# EAGLE board MLX_2X5 (EAGLE 9.6.2)
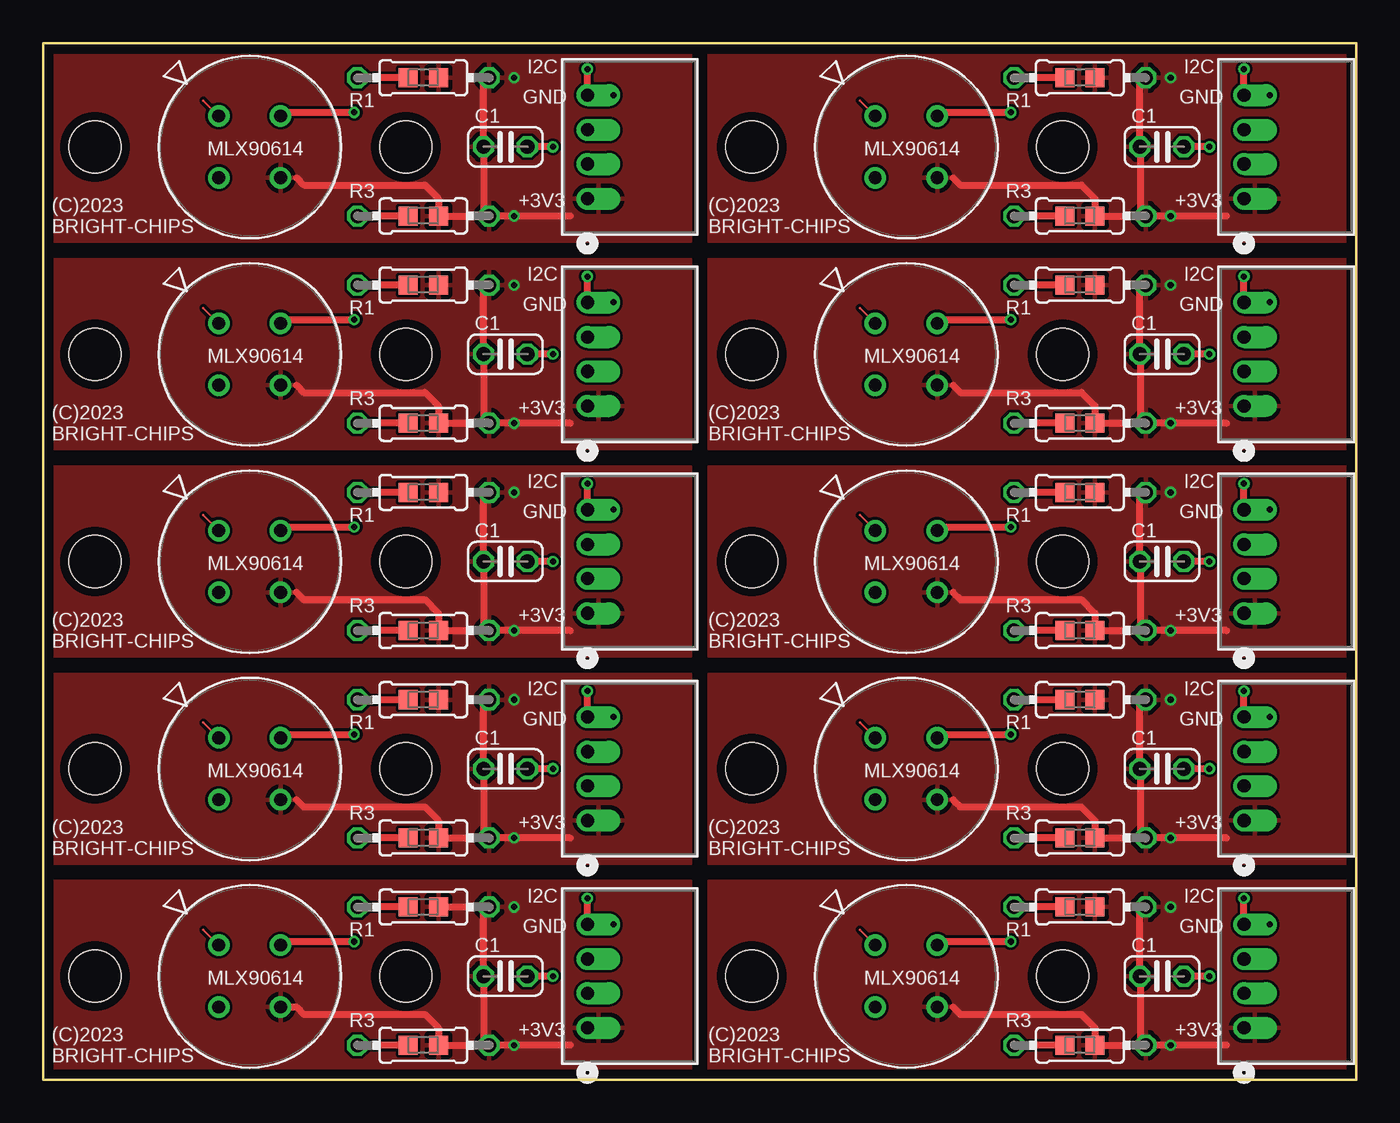
[diagram p0: board, top side]
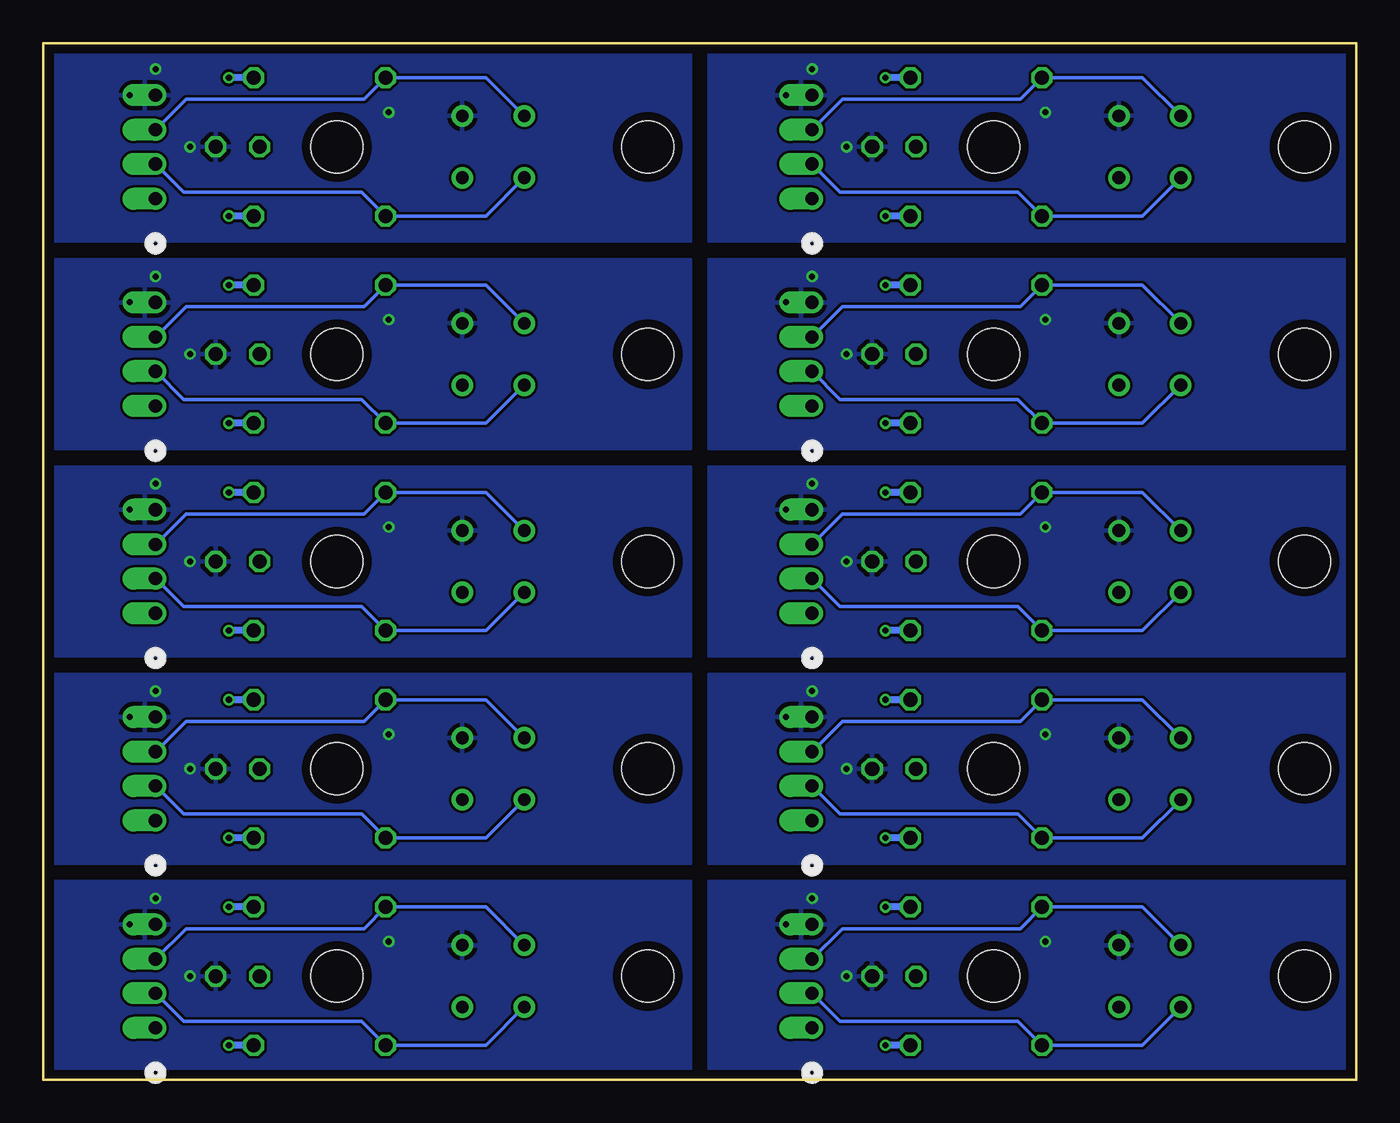
[diagram p1: board, bottom side, seen from below]

Size 76 x 60 mm. Coordinates in mm from the lower left corner, seen from the top.
Outline: 0,60 76,60 76,0 0,0 0,60
Copper layers (1*16): Top 0.035mm / dielectric 1.6mm / Bottom 0.035mm
Design rules "Elecrow_2-layer_PCB_eagle_rule": minimum track width 6mil, minimum drill 12mil, track to track 6mil, track to pad 6mil, pad to pad 6mil, via to via 8mil, smd to smd 0mil, copper to edge 20mil, drill to drill 10mil, minimum pad ring 6mil, minimum via ring 6mil, stop-mask expansion 0mil, vias tented up to drill 100mil, thermal gap 10mil
Holes 3 mm at 3,6 21,6 3,18 21,18 3,30 21,30 3,42 21,42 3,54 21,54 41,6 59,6 41,18 59,18 41,30 59,30 41,42 59,42 41,54 59,54
vRestrict: 5 lines

## Footprints (pad centres in the part's own frame; a part is rotated, then mirrored left to right if it is on the bottom)
C025-024X044 = drill 0.813 octagon: 1 -1.27,0; 2 1.27,0
CONN_S4B-PH-K-S_JST = drill 0.762 pad 1.27 offset: 1 0,0; 2 2.007,0; 3 3.988,0; 4 5.994,0
0204/7 = drill 0.813 octagon: 1 -3.81,0; 2 3.81,0
RESC1608X55N = smd 1.1 x 1.1: 1 -0.88,0; 2 0.88,0
MLX90614XCC_MEL = drill 0.737 pad 1.245: 1 0,0; 2 0,-3.581; 3 3.581,-3.581; 4 3.581,0

## Placement (x,y rotation side)
C1  [C025-024X044]  26.75,6 0 top
C2  [C025-024X044]  26.75,18 0 top
C3  [C025-024X044]  26.75,30 0 top
C4  [C025-024X044]  26.75,42 0 top
C5  [C025-024X044]  26.75,54 0 top
C6  [C025-024X044]  64.75,6 0 top
C7  [C025-024X044]  64.75,18 0 top
C8  [C025-024X044]  64.75,30 0 top
C9  [C025-024X044]  64.75,42 0 top
C10  [C025-024X044]  64.75,54 0 top
J1  S4B-PH-K-S(LF)(SN)  [CONN_S4B-PH-K-S_JST]  31.5,3 90 top
J2  S4B-PH-K-S(LF)(SN)  [CONN_S4B-PH-K-S_JST]  31.5,15 90 top
J3  S4B-PH-K-S(LF)(SN)  [CONN_S4B-PH-K-S_JST]  31.5,27 90 top
J4  S4B-PH-K-S(LF)(SN)  [CONN_S4B-PH-K-S_JST]  31.5,39 90 top
J5  S4B-PH-K-S(LF)(SN)  [CONN_S4B-PH-K-S_JST]  31.5,51 90 top
J6  S4B-PH-K-S(LF)(SN)  [CONN_S4B-PH-K-S_JST]  69.5,3 90 top
J7  S4B-PH-K-S(LF)(SN)  [CONN_S4B-PH-K-S_JST]  69.5,15 90 top
J8  S4B-PH-K-S(LF)(SN)  [CONN_S4B-PH-K-S_JST]  69.5,27 90 top
J9  S4B-PH-K-S(LF)(SN)  [CONN_S4B-PH-K-S_JST]  69.5,39 90 top
J10  S4B-PH-K-S(LF)(SN)  [CONN_S4B-PH-K-S_JST]  69.5,51 90 top
R1  [0204/7]  22,10 0 top
R2  RK73B1JTTD103J  [RESC1608X55N]  22,10 0 top
R3  [0204/7]  22,2 0 top
R4  RK73B1JTTD103J  [RESC1608X55N]  22,2 0 top
R5  [0204/7]  22,22 0 top
R6  RK73B1JTTD103J  [RESC1608X55N]  22,22 0 top
R7  [0204/7]  22,14 0 top
R8  RK73B1JTTD103J  [RESC1608X55N]  22,14 0 top
R9  [0204/7]  22,34 0 top
R10  RK73B1JTTD103J  [RESC1608X55N]  22,34 0 top
R11  [0204/7]  22,26 0 top
R12  RK73B1JTTD103J  [RESC1608X55N]  22,26 0 top
R13  [0204/7]  22,46 0 top
R14  RK73B1JTTD103J  [RESC1608X55N]  22,46 0 top
R15  [0204/7]  22,38 0 top
R16  RK73B1JTTD103J  [RESC1608X55N]  22,38 0 top
R17  [0204/7]  22,58 0 top
R18  RK73B1JTTD103J  [RESC1608X55N]  22,58 0 top
R19  [0204/7]  22,50 0 top
R20  RK73B1JTTD103J  [RESC1608X55N]  22,50 0 top
R21  [0204/7]  60,10 0 top
R22  RK73B1JTTD103J  [RESC1608X55N]  60,10 0 top
R23  [0204/7]  60,2 0 top
R24  RK73B1JTTD103J  [RESC1608X55N]  60,2 0 top
R25  [0204/7]  60,22 0 top
R26  RK73B1JTTD103J  [RESC1608X55N]  60,22 0 top
R27  [0204/7]  60,14 0 top
R28  RK73B1JTTD103J  [RESC1608X55N]  60,14 0 top
R29  [0204/7]  60,34 0 top
R30  RK73B1JTTD103J  [RESC1608X55N]  60,34 0 top
R31  [0204/7]  60,26 0 top
R32  RK73B1JTTD103J  [RESC1608X55N]  60,26 0 top
R33  [0204/7]  60,46 0 top
R34  RK73B1JTTD103J  [RESC1608X55N]  60,46 0 top
R35  [0204/7]  60,38 0 top
R36  RK73B1JTTD103J  [RESC1608X55N]  60,38 0 top
R37  [0204/7]  60,58 0 top
R38  RK73B1JTTD103J  [RESC1608X55N]  60,58 0 top
R39  [0204/7]  60,50 0 top
R40  RK73B1JTTD103J  [RESC1608X55N]  60,50 0 top
U1  MLX90614ESF-BCC-000-TU  [MLX90614XCC_MEL]  10.16,7.79 0 top
U2  MLX90614ESF-BCC-000-TU  [MLX90614XCC_MEL]  10.16,19.79 0 top
U3  MLX90614ESF-BCC-000-TU  [MLX90614XCC_MEL]  10.16,31.79 0 top
U4  MLX90614ESF-BCC-000-TU  [MLX90614XCC_MEL]  10.16,43.79 0 top
U5  MLX90614ESF-BCC-000-TU  [MLX90614XCC_MEL]  10.16,55.79 0 top
U6  MLX90614ESF-BCC-000-TU  [MLX90614XCC_MEL]  48.16,7.79 0 top
U7  MLX90614ESF-BCC-000-TU  [MLX90614XCC_MEL]  48.16,19.79 0 top
U8  MLX90614ESF-BCC-000-TU  [MLX90614XCC_MEL]  48.16,31.79 0 top
U9  MLX90614ESF-BCC-000-TU  [MLX90614XCC_MEL]  48.16,43.79 0 top
U10  MLX90614ESF-BCC-000-TU  [MLX90614XCC_MEL]  48.16,55.79 0 top

## Library data of the parts
C1-C10 = AU222_F; SPICEPREFIX: C
J1-J10 = AU222_F; COPYRIGHT: Copyright (C) 2023 Ultra Librarian. All rights reserved.; DIGI-KEY_PART_NUMBER_1: 455-1721-ND; DIGI-KEY_PART_NUMBER_2: 455-1721-NDL; MANUFACTURER_PART_NUMBER: S4B-PH-K-S(LF)(SN); MFR_NAME: JST
R1 R3 R5 R7 R9 R11 R13 R15 R17 R19 R21 R23 R25 R27 R29 R31 R33 R35 R37 R39 = AU222_F; SPICEPREFIX: R
R2 R4 R6 R8 R10 R12 R14 R16 R18 R20 R22 R24 R26 R28 R30 R32 R34 R36 R38 R40 = AU222_F; DESCRIPTION: 10 kOhms ±5% 0.1W, 1/10W Chip Resistor 0603 (1608 Metric) Automotive AEC-Q200, Moisture Resistant Thick Film; DIGI-KEY_PART_NUMBER: 2019-RK73B1JTTD103JCT-ND; MF: KOA Speer; MP: RK73B1JTTD103J; PACKAGE: 0603 KOA Speer; PURCHASE-URL: https://pricing.snapeda.com/search/part/RK73B1JTTD103J/?ref=eda
U1-U10 = AU222_F; COPYRIGHT: Copyright (C) 2023 Ultra Librarian. All rights reserved.; DIGI-KEY_PART_NUMBER_1: MLX90614ESF-BCC-000-TU-ND; MANUFACTURER_PART_NUMBER: MLX90614ESF-BCC-000-TU; MFR_NAME: Melexis

## Nets
+3V1: C2.1 J2.1 R5.2 R6.2 R7.2 R8.2 U2.3
+3V2: C3.1 J3.1 R9.2 R10.2 R11.2 R12.2 U3.3
+3V3: C1.1 J1.1 R1.2 R2.2 R3.2 R4.2 U1.3
+3V4: C4.1 J4.1 R13.2 R14.2 R15.2 R16.2 U4.3
+3V5: C5.1 J5.1 R17.2 R18.2 R19.2 R20.2 U5.3
+3V6: C6.1 J6.1 R21.2 R22.2 R23.2 R24.2 U6.3
+3V7: C7.1 J7.1 R25.2 R26.2 R27.2 R28.2 U7.3
+3V8: C8.1 J8.1 R29.2 R30.2 R31.2 R32.2 U8.3
+3V9: C9.1 J9.1 R33.2 R34.2 R35.2 R36.2 U9.3
+3V10: C10.1 J10.1 R37.2 R38.2 R39.2 R40.2 U10.3
GND: C1.2 J1.4 U1.4
GND1: C2.2 J2.4 U2.4
GND2: C3.2 J3.4 U3.4
GND3: C4.2 J4.4 U4.4
GND4: C5.2 J5.4 U5.4
GND5: C6.2 J6.4 U6.4
GND6: C7.2 J7.4 U7.4
GND7: C8.2 J8.4 U8.4
GND8: C9.2 J9.4 U9.4
GND9: C10.2 J10.4 U10.4
SCL: J1.3 R1.1 R2.1 U1.1
SCL1: J2.3 R5.1 R6.1 U2.1
SCL2: J3.3 R9.1 R10.1 U3.1
SCL3: J4.3 R13.1 R14.1 U4.1
SCL4: J5.3 R17.1 R18.1 U5.1
SCL5: J6.3 R21.1 R22.1 U6.1
SCL6: J7.3 R25.1 R26.1 U7.1
SCL7: J8.3 R29.1 R30.1 U8.1
SCL8: J9.3 R33.1 R34.1 U9.1
SCL9: J10.3 R37.1 R38.1 U10.1
SDA: J1.2 R3.1 R4.1 U1.2
SDA1: J2.2 R7.1 R8.1 U2.2
SDA2: J3.2 R11.1 R12.1 U3.2
SDA3: J4.2 R15.1 R16.1 U4.2
SDA4: J5.2 R19.1 R20.1 U5.2
SDA5: J6.2 R23.1 R24.1 U6.2
SDA6: J7.2 R27.1 R28.1 U7.2
SDA7: J8.2 R31.1 R32.1 U8.2
SDA8: J9.2 R35.1 R36.1 U9.2
SDA9: J10.2 R39.1 R40.1 U10.2

## Tracks (layer width: path | path; a pad name or v marks a point on that pad's centre or on a via)
+3V1  (via drill 0.35)
  Top 0.406: 25.5,14 R8.2 22.88,15 22.09,15.79 15.08,15.79 14.66,16.21 | 25.5,14 R7.2 30.5,14 | 25.5,14 25.5,17.98 C2.1 25.48,21.98 25.5,22
  Bottom 0.406: R5.2 v27.25,22 | R7.2 v27.25,14
  pour Top: 0.5,23.5 0.5,12.5 37.5,12.5 37.5,23.5
+3V2  (via drill 0.35)
  Top 0.406: 25.5,26 R12.2 22.88,27 22.09,27.79 15.08,27.79 14.66,28.21 | 25.5,26 R11.2 30.5,26 | 25.5,26 25.5,29.98 C3.1 25.48,33.98 25.5,34
  Bottom 0.406: R9.2 v27.25,34 | R11.2 v27.25,26
  pour Top: 0.5,35.5 0.5,24.5 37.5,24.5 37.5,35.5
+3V3  (via drill 0.35)
  Top 0.406: R2.2 25.5,10 | 25.5,10 R1.2 | 25.5,2 R4.2 22.88,3 22.09,3.79 15.08,3.79 14.66,4.21 U1.3 | 25.5,2 R3.2 30.5,2 | 25.5,2 25.5,5.98 C1.1 25.48,9.98 25.5,10
  Bottom 0.406: R1.2 v27.25,10 | R3.2 v27.25,2
  pour Top: 0.5,11.5 0.5,0.5 37.5,0.5 37.5,11.5
+3V4  (via drill 0.35)
  Top 0.406: 25.5,38 R16.2 22.88,39 22.09,39.79 15.08,39.79 14.66,40.21 | 25.5,38 R15.2 30.5,38 | 25.5,38 25.5,41.98 C4.1 25.48,45.98 25.5,46
  Bottom 0.406: R13.2 v27.25,46 | R15.2 v27.25,38
  pour Top: 0.5,47.5 0.5,36.5 37.5,36.5 37.5,47.5
+3V5  (via drill 0.35)
  Top 0.406: 25.5,50 R20.2 22.88,51 22.09,51.79 15.08,51.79 14.66,52.21 | 25.5,50 R19.2 30.5,50 | 25.5,50 25.5,53.98 C5.1 25.48,57.98 25.5,58
  Bottom 0.406: R17.2 v27.25,58 | R19.2 v27.25,50
  pour Top: 0.5,59.5 0.5,48.5 37.5,48.5 37.5,59.5
+3V6  (via drill 0.35)
  Top 0.406: 63.5,2 R24.2 60.88,3 60.09,3.79 53.08,3.79 52.66,4.21 | 63.5,2 R23.2 68.5,2 | 63.5,2 63.5,5.98 C6.1 63.48,9.98 63.5,10
  Bottom 0.406: R21.2 v65.25,10 | R23.2 v65.25,2
  pour Top: 38.5,11.5 38.5,0.5 75.5,0.5 75.5,11.5
+3V7  (via drill 0.35)
  Top 0.406: 63.5,14 R28.2 60.88,15 60.09,15.79 53.08,15.79 52.66,16.21 | 63.5,14 R27.2 68.5,14 | 63.5,14 63.5,17.98 C7.1 63.48,21.98 63.5,22
  Bottom 0.406: R25.2 v65.25,22 | R27.2 v65.25,14
  pour Top: 38.5,23.5 38.5,12.5 75.5,12.5 75.5,23.5
+3V8  (via drill 0.35)
  Top 0.406: 63.5,26 R32.2 60.88,27 60.09,27.79 53.08,27.79 52.66,28.21 | 63.5,26 R31.2 68.5,26 | 63.5,26 63.5,29.98 C8.1 63.48,33.98 63.5,34
  Bottom 0.406: R29.2 v65.25,34 | R31.2 v65.25,26
  pour Top: 38.5,35.5 38.5,24.5 75.5,24.5 75.5,35.5
+3V9  (via drill 0.35)
  Top 0.406: 63.5,38 R36.2 60.88,39 60.09,39.79 53.08,39.79 52.66,40.21 | 63.5,38 R35.2 68.5,38 | 63.5,38 63.5,41.98 C9.1 63.48,45.98 63.5,46
  Bottom 0.406: R33.2 v65.25,46 | R35.2 v65.25,38
  pour Top: 38.5,47.5 38.5,36.5 75.5,36.5 75.5,47.5
+3V10  (via drill 0.35)
  Top 0.406: 63.5,50 R40.2 60.88,51 60.09,51.79 53.08,51.79 52.66,52.21 | 63.5,50 R39.2 68.5,50 | 63.5,50 63.5,53.98 C10.1 63.48,57.98 63.5,58
  Bottom 0.406: R37.2 v65.25,58 | R39.2 v65.25,50
  pour Top: 38.5,59.5 38.5,48.5 75.5,48.5 75.5,59.5
GND  (via drill 0.35)
  Top 0.406: v29.5,6 C1.2 | v31.5,10.5 J1.4 v32.99,8.99 v33,9 | 13.95,8 v18,8
  pour Bottom: 0.5,11.5 0.5,0.5 37.5,0.5 37.5,11.5
GND1  (via drill 0.35)
  Top 0.406: v29.5,18 C2.2 | v31.5,22.5 J2.4 v32.99,20.99 v33,21 | 13.95,20 v18,20
  pour Bottom: 0.5,23.5 0.5,12.5 37.5,12.5 37.5,23.5
GND2  (via drill 0.35)
  Top 0.406: v29.5,30 C3.2 | v31.5,34.5 J3.4 v32.99,32.99 v33,33 | 13.95,32 v18,32
  pour Bottom: 0.5,35.5 0.5,24.5 37.5,24.5 37.5,35.5
GND3  (via drill 0.35)
  Top 0.406: v29.5,42 C4.2 | v31.5,46.5 J4.4 v32.99,44.99 v33,45 | 13.95,44 v18,44
  pour Bottom: 0.5,47.5 0.5,36.5 37.5,36.5 37.5,47.5
GND4  (via drill 0.35)
  Top 0.406: v29.5,54 C5.2 | v31.5,58.5 J5.4 v32.99,56.99 v33,57 | 13.95,56 v18,56
  pour Bottom: 0.5,59.5 0.5,48.5 37.5,48.5 37.5,59.5
GND5  (via drill 0.35)
  Top 0.406: v67.5,6 C6.2 | v69.5,10.5 J6.4 v70.99,8.99 v71,9 | 51.95,8 v56,8
  pour Bottom: 38.5,11.5 38.5,0.5 75.5,0.5 75.5,11.5
GND6  (via drill 0.35)
  Top 0.406: v67.5,18 C7.2 | v69.5,22.5 J7.4 v70.99,20.99 v71,21 | 51.95,20 v56,20
  pour Bottom: 38.5,23.5 38.5,12.5 75.5,12.5 75.5,23.5
GND7  (via drill 0.35)
  Top 0.406: v67.5,30 C8.2 | v69.5,34.5 J8.4 v70.99,32.99 v71,33 | 51.95,32 v56,32
  pour Bottom: 38.5,35.5 38.5,24.5 75.5,24.5 75.5,35.5
GND8  (via drill 0.35)
  Top 0.406: v67.5,42 C9.2 | v69.5,46.5 J9.4 v70.99,44.99 v71,45 | 51.95,44 v56,44
  pour Bottom: 38.5,47.5 38.5,36.5 75.5,36.5 75.5,47.5
GND9  (via drill 0.35)
  Top 0.406: v67.5,54 C10.2 | v69.5,58.5 J10.4 v70.99,56.99 v71,57 | 51.95,56 v56,56
  pour Bottom: 38.5,59.5 38.5,48.5 75.5,48.5 75.5,59.5
SCL
  Top 0.406: R2.1 R1.1
  Bottom 0.2: J1.3 29.74,8.75 19.44,8.75 R1.1 12.37,10 U1.1
SCL1
  Top 0.406: R6.1 R5.1
  Bottom 0.2: J2.3 29.74,20.75 19.44,20.75 R5.1 12.37,22 U2.1
SCL2
  Top 0.406: R10.1 R9.1
  Bottom 0.2: J3.3 29.74,32.75 19.44,32.75 R9.1 12.37,34 U3.1
SCL3
  Top 0.406: R14.1 R13.1
  Bottom 0.2: J4.3 29.74,44.75 19.44,44.75 R13.1 12.37,46 U4.1
SCL4
  Top 0.406: R18.1 R17.1
  Bottom 0.2: J5.3 29.74,56.75 19.44,56.75 R17.1 12.37,58 U5.1
SCL5
  Top 0.406: R22.1 R21.1
  Bottom 0.2: J6.3 67.74,8.75 57.44,8.75 R21.1 50.37,10 U6.1
SCL6
  Top 0.406: R26.1 R25.1
  Bottom 0.2: J7.3 67.74,20.75 57.44,20.75 R25.1 50.37,22 U7.1
SCL7
  Top 0.406: R30.1 R29.1
  Bottom 0.2: J8.3 67.74,32.75 57.44,32.75 R29.1 50.37,34 U8.1
SCL8
  Top 0.406: R34.1 R33.1
  Bottom 0.2: J9.3 67.74,44.75 57.44,44.75 R33.1 50.37,46 U9.1
SCL9
  Top 0.406: R38.1 R37.1
  Bottom 0.2: J10.3 67.74,56.75 57.44,56.75 R37.1 50.37,58 U10.1
SDA
  Top 0.406: R4.1 R3.1
  Bottom 0.2: J1.2 29.88,3.38 19.57,3.38 R3.1 12.37,2 U1.2
SDA1
  Top 0.406: R8.1 R7.1
  Bottom 0.2: J2.2 29.88,15.38 19.57,15.38 R7.1 12.37,14 U2.2
SDA2
  Top 0.406: R12.1 R11.1
  Bottom 0.2: J3.2 29.88,27.38 19.57,27.38 R11.1 12.37,26 U3.2
SDA3
  Top 0.406: R16.1 R15.1
  Bottom 0.2: J4.2 29.88,39.38 19.57,39.38 R15.1 12.37,38 U4.2
SDA4
  Top 0.406: R20.1 R19.1
  Bottom 0.2: J5.2 29.88,51.38 19.57,51.38 R19.1 12.37,50 U5.2
SDA5
  Top 0.406: R24.1 R23.1
  Bottom 0.2: J6.2 67.88,3.38 57.57,3.38 R23.1 50.37,2 U6.2
SDA6
  Top 0.406: R28.1 R27.1
  Bottom 0.2: J7.2 67.88,15.38 57.57,15.38 R27.1 50.37,14 U7.2
SDA7
  Top 0.406: R32.1 R31.1
  Bottom 0.2: J8.2 67.88,27.38 57.57,27.38 R31.1 50.37,26 U8.2
SDA8
  Top 0.406: R36.1 R35.1
  Bottom 0.2: J9.2 67.88,39.38 57.57,39.38 R35.1 50.37,38 U9.2
SDA9
  Top 0.406: R40.1 R39.1
  Bottom 0.2: J10.2 67.88,51.38 57.57,51.38 R39.1 50.37,50 U10.2

## Text on the board
tPlace: I2C | I2C | GND | GND | MLX90614 | MLX90614 | +3V3 | +3V3 | (C)2023 / BRIGHT-CHIPS | (C)2023 / BRIGHT-CHIPS | I2C | I2C | GND | GND | MLX90614 | MLX90614 | +3V3 | +3V3 | (C)2023 / BRIGHT-CHIPS | (C)2023 / BRIGHT-CHIPS | I2C | I2C | GND | GND | MLX90614 | MLX90614 | +3V3 | +3V3 | (C)2023 / BRIGHT-CHIPS | (C)2023 / BRIGHT-CHIPS | I2C | I2C | GND | GND | MLX90614 | MLX90614 | +3V3 | +3V3 | (C)2023 / BRIGHT-CHIPS | (C)2023 / BRIGHT-CHIPS | I2C | I2C | GND | GND | MLX90614 | MLX90614 | +3V3 | +3V3 | (C)2023 / BRIGHT-CHIPS | (C)2023 / BRIGHT-CHIPS
vRestrict: V-cut | V-cut | V-cut | V-cut | V-cut
_tNames: R1 | R1 | C1 | C1 | R3 | R3 | R1 | R1 | C1 | C1 | R3 | R3 | R1 | R1 | C1 | C1 | R3 | R3 | R1 | R1 | C1 | C1 | R3 | R3 | R1 | R1 | C1 | C1 | R3 | R3
_tValues: U1 | U1 | J1 | J1 | U1 | U1 | J1 | J1 | U1 | U1 | J1 | J1 | U1 | U1 | J1 | J1 | U1 | U1 | J1 | J1